# Altium PCB PCB1.PcbDoc
Units mm, origin at the board's own origin, x right, y up, seen from the top; angles counter-clockwise.
Board outline 149.22 x 99.06 mm, 2 copper layers (Top Layer, Bottom Layer); 29 components, 23 nets, 115 pads, 8 vias.
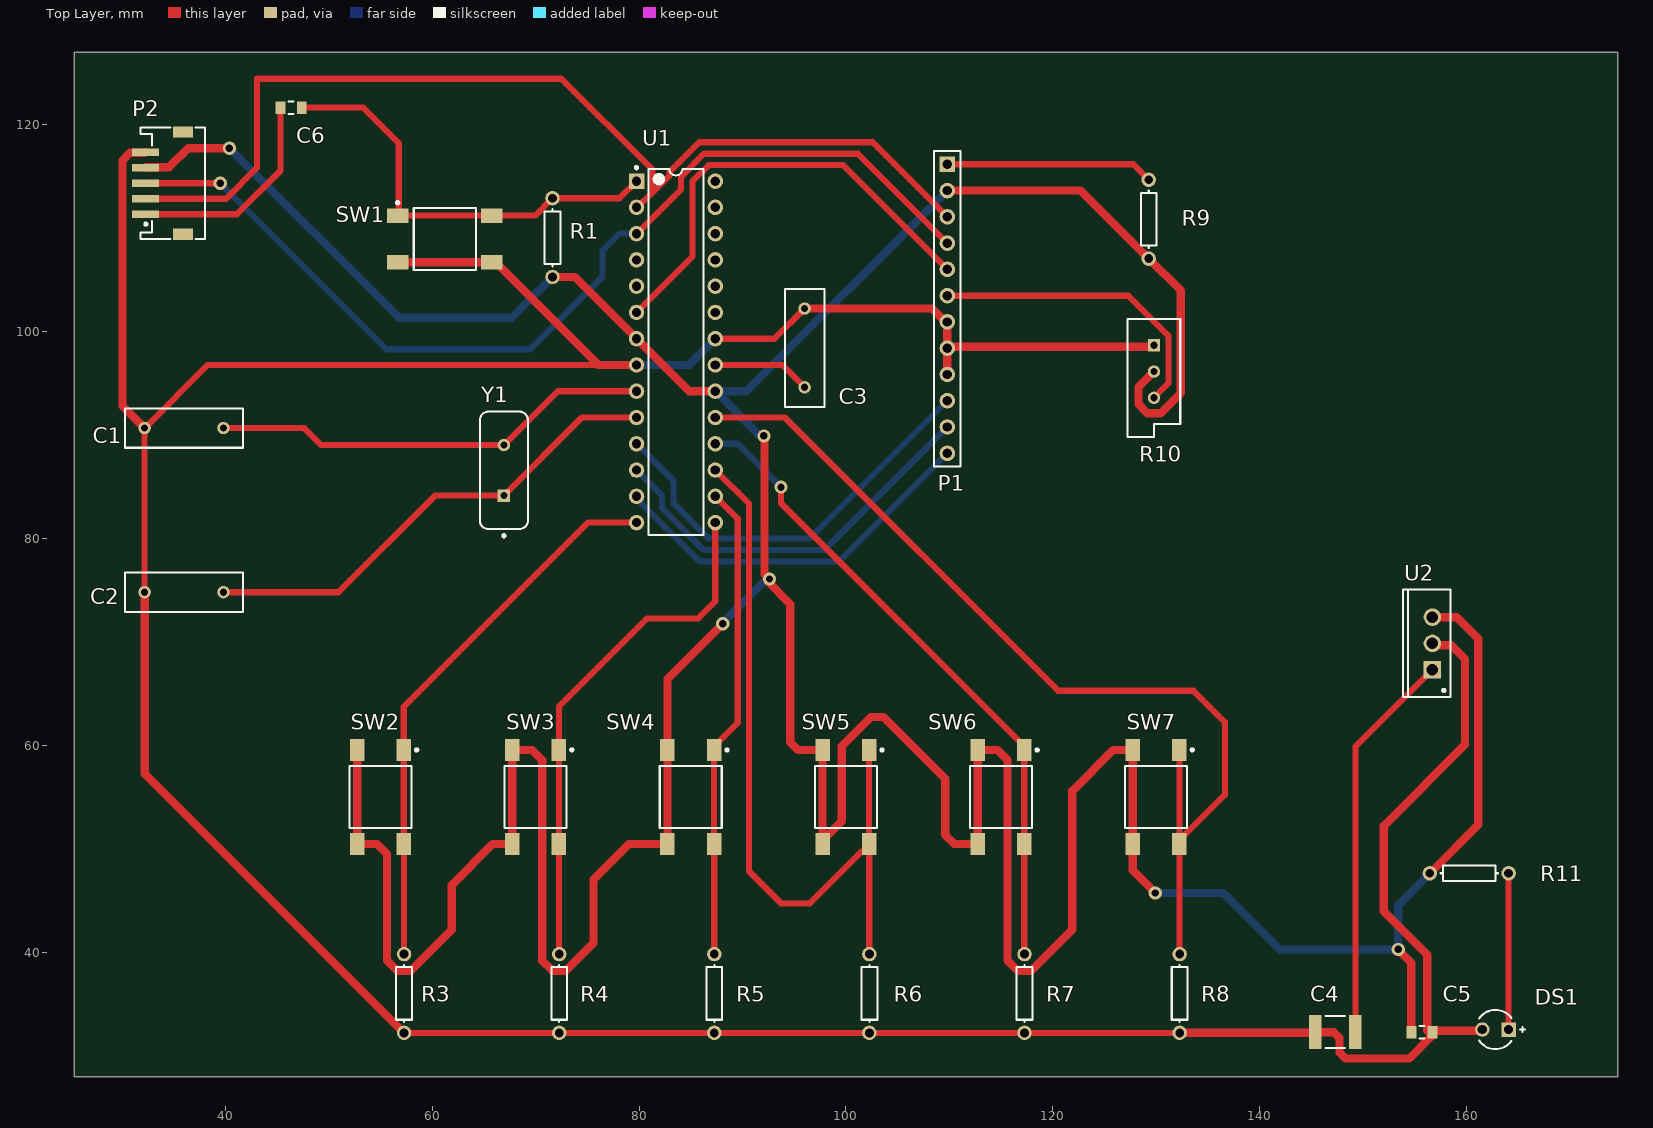
[diagram p0: Top Layer view]
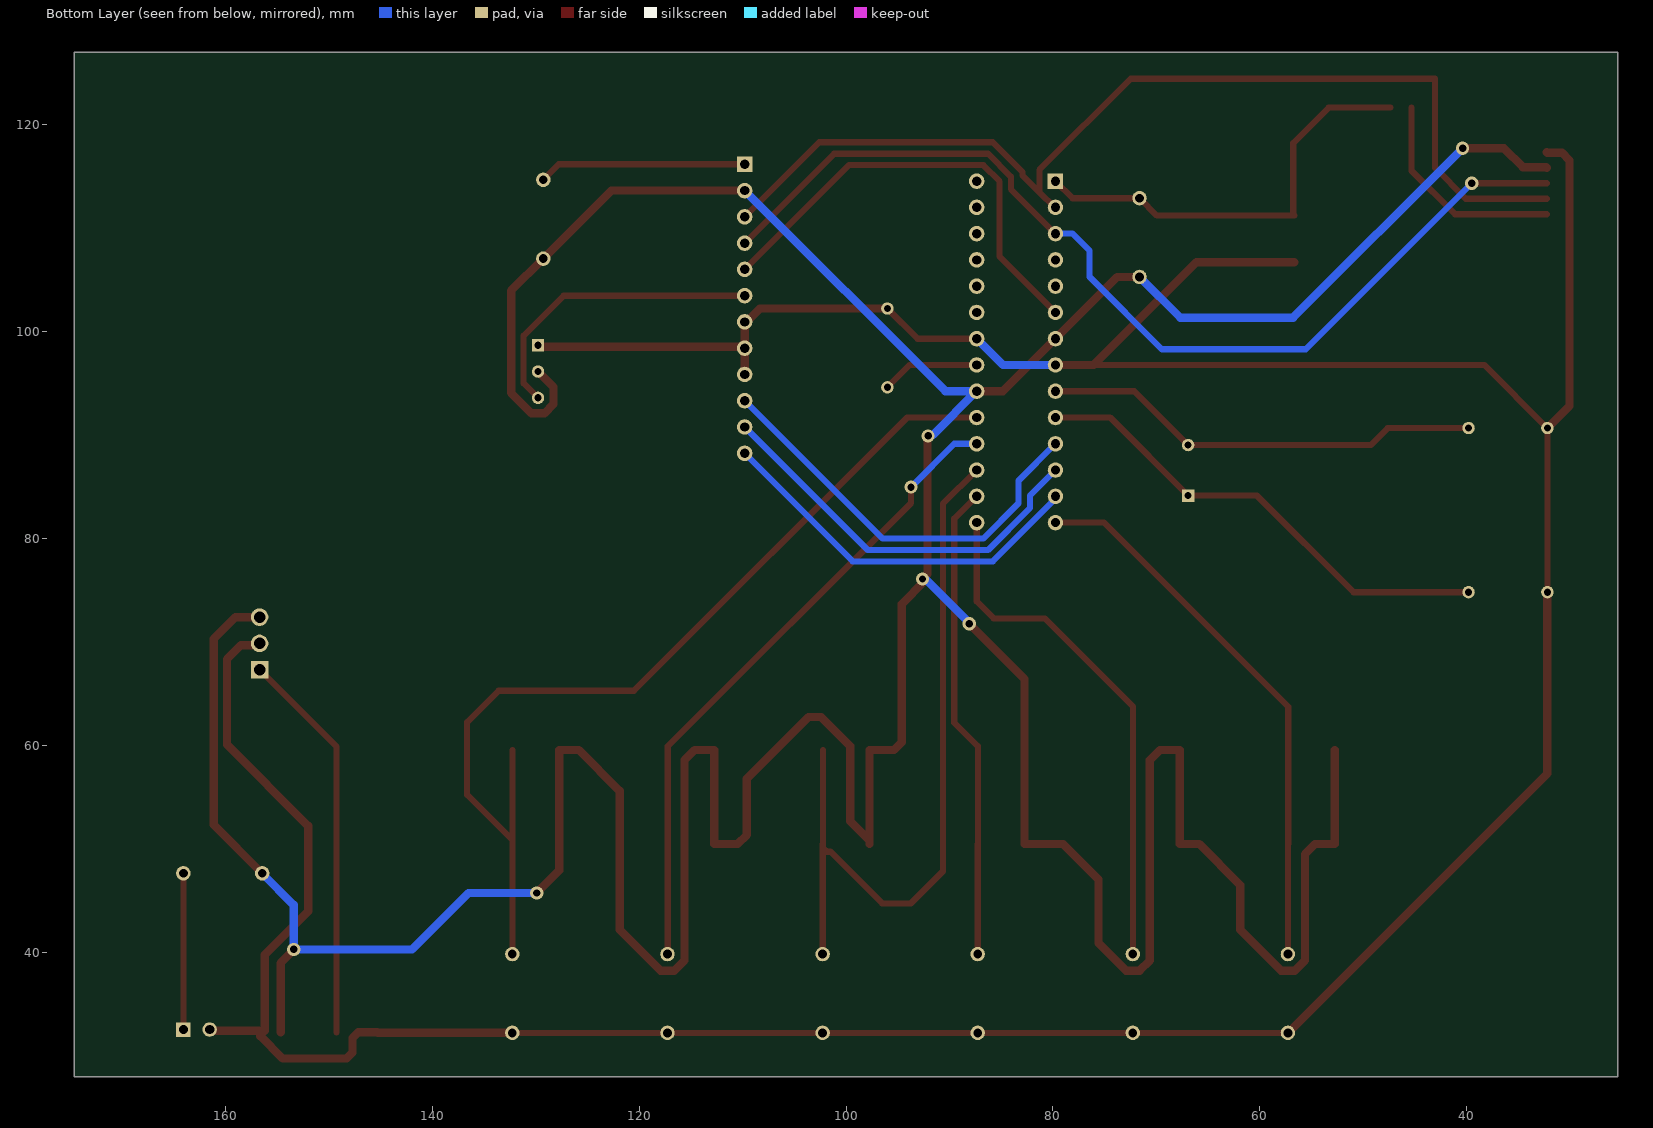
[diagram p1: Bottom Layer view, seen from below]

## Layer stack, top to bottom
Top Solder: solder mask 0.0102, Solder Resist, Dk 3.5
Top Layer: signal copper 0.0356
Dielectric 1: dielectric 0.32, FR-4, Dk 4.8
Bottom Layer: signal copper 0.0356
Bottom Solder: solder mask 0.0102, Solder Resist, Dk 3.5

## Board outline
25.4,127 174.625,127 174.625,27.94 25.4,27.94

## Design rules (kind name [scope] priority, off if disabled: settings)
Clearance [All] p1: gap=0.5 ignorepadtopadclearanceinfootprint=TRUE
PolygonConnect [All] p1: connectstyle=Relief reliefconductorwidth=0.254 reliefentries=4 polygonreliefangle="90 Angle" airgapwidth=0.254
RoutingVias [All] p1: holewidth=0.711 width=1.27 viastyle="Through Hole" minholewidth=0.711 minwidth=1.27 maxholewidth=0.711 maxwidth=1.27
SilkToSolderMaskClearance [IsPad] p1: minsilkscreentomaskgap=0.127 clearancetoexposedcopper=TRUE
SolderMaskExpansion [All] p1: expansion=0.102 istentingtop=FALSE
Width Width_1 [InNet('+5') or InNet('GND')] p1: maxlimit=0.9 minlimit=0.5 preferedwidth=0.8 minimp=50.000000 maximp=50.000000 favimp=50.000000
Width [All] p2: maxlimit=0.8 minlimit=0.3 preferedwidth=0.6 minimp=50.000000 maximp=50.000000 favimp=50.000000
29 further rules are at their usual default settings.

## Components (designator, comment, footprint, x,y, rotation, side; value= is the part's Value field where it differs from the comment)
C1 "22pF" RAD-0.3 36,90.678 r180 top
C2 "22pF" RAD-0.3 36,74.803 r180 top
C3 "100nF" RAD-0.3 96.012,98.425 r270 top
C4 "330nF" CAPC1812(4532)100_L 147.32,32.258 r0 top
C5 "100nF" FP-CGA3E-0_3-0_1-IPC_A 155.702,32.258 r0 top
C6 "100nF" FP-CGA3E-0_3-0_1-IPC_A 46.355,121.666 r180 top
DS1 "LED" INDPR60-254-520X380X650 162.814,32.512 r180 top
P1 "Header 12" HDR1X12 109.812,116.178 r270 top
P2 "To FTDI" 648105131822 34.908,114.348 r90 top
R1 "10K" AXIAL-0.3 71.628,109.093 r270 top
R3 "10K" AXIAL-0.3 57.277,36 r90 top
R4 "10K" AXIAL-0.3 72.277,36 r90 top
R5 "10K" AXIAL-0.3 87.277,36 r90 top
R6 "10K" AXIAL-0.3 102.277,36 r90 top
R7 "10K" AXIAL-0.3 117.277,36 r90 top
R8 "10K" AXIAL-0.3 132.277,36 r90 top
R9 "220 Ohm" AXIAL-0.3 129.286,110.871 r270 top
R10 "RPot" VR5 129.794,96.139 r270 top value=1K
R11 "1K" AXIAL-0.3 160.274,47.625 r0 top
SW1 "" TECO-FSM4JSMA_V 61.214,108.966 r90 top
SW2 "Select Button" TECO-FSM4JSMA_V 55,55 r0 top
SW3 "Up Button" TECO-FSM4JSMA_V 70,55 r0 top
SW4 "Down Button" TECO-FSM4JSMA_V 85,55 r0 top
SW5 "Left Button" TECO-FSM4JSMA_V 100,55 r0 top
SW6 "Right Button" TECO-FSM4JSMA_V 115,55 r0 top
SW7 "Back Button" TECO-FSM4JSMA_V 130,55 r0 top
U1 "ATmega328-PU" 28P3 83.566,98.044 r0 top
U2 "L78M05CV" TO220 156.718,69.85 r90 top
Y1 "16Mhz" FOX-FOXSLF160-20 66.929,86.587 r90 top

## Footprints (in the part's own frame and the unit in brackets; to place one, negate y for a bottom-side part, rotate by r counter-clockwise, add the part's x,y. Pads: shape width x height; smd on the part's side, far side on the other; paste and mask are expansions set on the pad)
28P3 [mm] "28-Pin Plastic Dual In-Line Package (PDIP)"
  rect 1.5x1.5 hole 0.9: 1(-3.81,16.51)
  round 1.5 hole 0.9: 2(-3.81,13.97) 3(-3.81,11.43) 4(-3.81,8.89) 5(-3.81,6.35) 6(-3.81,3.81) 7(-3.81,1.27) 8(-3.81,-1.27) 9(-3.81,-3.81) 10(-3.81,-6.35) 11(-3.81,-8.89) 12(-3.81,-11.43) 13(-3.81,-13.97) 14(-3.81,-16.51) 15(3.81,-16.51) 16(3.81,-13.97) 17(3.81,-11.43) 18(3.81,-8.89) 19(3.81,-6.35) 20(3.81,-3.81) 21(3.81,-1.27) 22(3.81,1.27) 23(3.81,3.81) 24(3.81,6.35) 25(3.81,8.89) 26(3.81,11.43) 27(3.81,13.97) 28(3.81,16.51)
  silkscreen extent -3.93,-17.7 2.65,17.93, body extent -3.6,-17.65 3.6,17.65, height 4.58
648105131822 [mm] "1.50mm SMT Male Horizontal Shrouded Header, 5p"
  rect 0.7x2.6 smd: 1(-3,2.65) 2(-1.5,2.65) 3(0,2.65) 4(1.5,2.65) 5(3,2.65)
  rect 1.1x1.9 smd: MP1(-4.95,-1) MP2(4.95,-1)
  silkscreen extent -5.4,-3.13 5.4,3.13, body extent -5.35,-3 5.35,3.47, height 3.74
AXIAL-0.3 [mm] "Axial Device, Thru-Hole; 2 Leads; 0.3 in Pin Spacing"
  round 1.4 hole 0.85: 1(-3.81,0) 2(3.81,0)
  silkscreen extent -2.77,-0.76 2.77,0.76
CAPC1812(4532)100_L [mm] "Chip Capacitor, Body 4.5x3.2mm, Height 1mm, IPC High Density"
  rect 1.2x3.3 smd: 1(-1.95,0) 2(1.95,0)
  silkscreen extent -0.95,-1.55 0.95,1.55, body extent -2.4,-1.7 2.4,1.7, height 1
FOX-FOXSLF160-20 [mm] "THD, 2-Leads, Body 11.35x4.65mm"
  rect 1.2x1.2 hole 0.7: 1(-2.44,0)
  round 1.2 hole 0.7: 2(2.44,0)
  silkscreen extent -6.45,-2.32 5.68,2.32, body extent -5.67,-2.32 5.68,2.33, height 3.6
FP-CGA3E-0_3-0_1-IPC_A [mm]
  rect 0.956x1.206 smd paste+0 mask+0: 1(-1.025,0) 2(1.025,0)
  silkscreen extent -0.25,-0.6 0.25,0.6, body extent -2,-1.1 2,1.1, height 0.25
HDR1X12 [mm] "Connector; Header; 12 Position"
  rect 1.5x1.5 hole 0.9: 1(0,0)
  round 1.5 hole 0.9: 2(2.54,0) 3(5.08,0) 4(7.62,0) 5(10.16,0) 6(12.7,0) 7(15.24,0) 8(17.78,0) 9(20.32,0) 10(22.86,0) 11(25.4,0) 12(27.94,0)
  silkscreen extent -1.27,-1.27 29.21,1.27
INDPR60-254-520X380X650 [mm] "THD, 2-Leads, Dia 3.8mm, Pitch 2.54mm"
  rect 1.4x1.4 hole 0.9: 1(-1.27,0)
  round 1.4 hole 0.9: 2(1.27,0)
  silkscreen extent -2.87,-1.9 1.58,1.9, body extent -1.9,-1.9 1.9,1.9, height 6.5
RAD-0.3 [mm] "Radial Cap, Thru-Hole; 2 Leads; 0.3 in Pin Spacing"
  round 1.2 hole 0.7: 1(-3.81,0) 2(3.81,0)
  silkscreen extent -5.71,-1.91 5.71,1.91
TECO-FSM4JSMA_V [mm] "SMD, 4-Leads, Body 6x6mm, Pitch 4.5mm"
  rect 1.4x2.1 smd: 1(2.25,4.55) 2(2.25,-4.55) 3(-2.25,4.55) 4(-2.25,-4.55)
  silkscreen extent -3,-3 3.62,4.67, body extent -3,-5 3,5, height 5.08
TO220 [mm] "TO, Thru-Hole, Vertical, Heatsink Mounted; 3 In-Line Leads; Pitch 2.54 mm"
  rect 1.7x1.7 hole 1.1: 1(-2.54,0)
  round 1.7 hole 1.1: 2(0,0) 3(2.54,0)
  silkscreen extent -5.2,-1.75 5.2,2.85, body extent -5.25,-1.8 5.25,2.9, height 19.7
VR5 [mm] "Thru-Hole; 3 Leads"
  rect 1.2x1.2 hole 0.7: 1(-2.54,0)
  round 1.2 hole 0.7: 2(0,0) 3(2.54,0)
  silkscreen extent -5.08,-2.54 6.35,2.54

## Part data
C1 C2 C3: library part Cap, "Capacitor", LatestRevisionDate=17-Jul-2002, LatestRevisionNote="Re-released for DXP Platform.", PackageDescription="Radial Cap, Thru-Hole; 2 Leads; 0.3 in Pin Spacing", PackageReference=RAD-0.3, Published=8-Jun-2000, Publisher="Altium Limited"
C4: library part CMP-1040-01492-1, "CAP 330nF 50V ±10% 1812 (4532 Metric) Thickness 1mm SMD", Case-EIA=1812, Case-Metric=4532, Rated Voltage="50 V", Tolerance=Â±10%, Max Thickness="1 mm", Technology=SMT
C5 C6: library part CMP-2000-07546-2, "Cap Ceramic 100nF 50V X7R 10% Pad SMD 0603 +125°C Automotive T/R", Case Code (Imperial)=0603, Case Code (Metric)=1608, Dielectric=X7R, Max Operating Temperature=125°C, Min Operating Temperature=-55°C, Package Quantity=1, Ratings=AEC-Q200, Tolerance=10%, Voltage=50V, Capacitance=100nF, Case/Package=0603, Composition=Ceramic, Depth=0.8mm, Height=0.8mm, Lead Free="Lead Free", Length=1.6mm, Mount="Surface Mount", Packaging="Tape and Reel", Radiation Hardening=No, REACH SVHC="No SVHC", Termination=SMD/SMT, Thickness=0.035inch, Voltage Rating=50V, Voltage Rating (DC)=50V, Weight=7.1E-05oz, Width=0.8mm
DS1: library part CMP-1674-00005-1, "Radial LED, 12.6 mcd, 20 mA, 2 V, -55 to 100 degC, 2-Pin THD, RoHS, Bulk", Case\Package=Radial, Current Rating="3.6 A", Max Operating Temperature="130 degC", Min Operating Temperature="-40 degC", Package Quantity=55, Resistance="0.045 Ohm", Tolerance=20%, ComponentLink1Description="Manufacturer URL", ComponentLink1URL=http://www.us.liteon.com/, ComponentLink2Description=Datasheet, ComponentLink2URL=https://datasheet.ciiva.com/15117/getdatasheetpartid-187746-15117985.pdf, DatasheetVersion=Dec-03, Height="1.1 inch", Lead Pitch="11.44 mm", Length="0.97 inch", Mount="Through Hole", PackageDescription="2-Pin Through Hole Device, Dia 3.8 mm, Pitch 2.54 mm", PackageReference=LTL-1CHE, Packaging=Tray, Radiation Hardening=No, RoHSCompliant=true, Shielding=Unshielded, Width="0.62 inch"
P1: "Header, 12-Pin", LatestRevisionDate=17-Jul-2002, LatestRevisionNote="Re-released for DXP Platform.", Publisher="Altium Limited"
P2: library part CMP-1502-00733-1, "Male Shrouded Header WR-WTB, SMT, Right Angled, pitch 1.5 mm, 1 x 5 position", Contact Resistance=20mOhm, Manufacturer="Wurth Elektronik", Operating Temperature=-25to85degC, Package Reference=648105131822, Working Voltage=50VAC, Datasheet URL=https://katalog.we-online.de/em/datasheet/6481xx131822.pdf, Gender=Male, Manufacturer URL=http://www.we-online.de, Mounting Technology=SMT, Orientation=RightAngled, Packaging=TapeandReel, Part Number=648105131822, Pitch=1.5mm, Position=1x5, Publisher=WurthElektronik
R1 R3 R4 R5 R6 R7 R8 R9 R11: library part Res1, "Resistor", LatestRevisionDate=17-Jul-2002, LatestRevisionNote="Re-released for DXP Platform.", PackageDescription="Axial Device, Thru-Hole; 2 Leads; 0.3 in Pin Spacing", PackageReference=AXIAL-0.3, Published=8-Jun-2000, Publisher="Altium Limited"
R10: "Potentiometer", LatestRevisionDate=17-Jul-2002, LatestRevisionNote="Re-released for DXP Platform.", PackageDescription="Variable Resistor, Thru-Hole; 3 Leads", PackageReference=VR5, Published=8-Jun-2000, Publisher="Altium Limited", Set Position=0.5, Sim Note="Enter the Resistance value and the set point into parameter fields."
SW1 SW2 SW3 SW4 SW5 SW6 SW7: library part CMP-2000-05602-2, "Swicth, SPST, 24 V, -35 to 85 degC, 4-Pin SMD, RoHS, Tape and Reel", Case\/Package=SMD/SMT, Contact Current Rating=50mA, Contact Resistance=100mOhm, Manufacturer="TE Connectivity", Max Operating Temperature=85degC, Max Voltage Rating (DC)=12V, Min Operating Temperature=-35degC, Operating Force=1.57N, Package Description="4-Pin Surface Mount Device, Body 6 x 6 mm, Pitch 4.5 mm", Package Quantity=750, Package Reference=FSM4JSMA, Voltage Rating=24V, Actuator Length=0.055inch, Actuator Material=Polyamide, Contact Material=CopperAlloy, Contact Plating=Silver, Current Rating=50mA, Datasheet URL=http://www.te.com/commerce/DocumentDelivery/DDEController?Action=showdoc&DocId=Customer+Drawing%7F2-1437565-7%7FV%7Fpdf%7FEnglish%7FENG_CD_2-1437565-7_V.pdf%7F4-1437565-2, Datasheet Version="Rev. V, 02/2015", Electrical Life=100000Cycles, Illumination Type=Illuminated, Length=6mm, Manufacturer URL=http://www.te.com/, Mechanical Life=100000Cycles, Mount=SurfaceMount, Mounting Technology=SurfaceMount, Orientation=Straight, Packaging=LoosePiece, REACH SVHC=Unknown, RoHSCompliant=true, Switch Travel=0.25mm, Termination=GullWing, Throw Configuration=SPST, Voltage Rating (DC)=24V, Width=6mm
U1: library part CMP-0095-00015-2, "8-bit AVR Microcontroller, 32KB Flash, 1KB EEPROM, 2KB SRAM, 28-pin PDIP, Industrial Grade (-40°C to 85°C)", ComponentLink1Description="Manufacturer URL", ComponentLink1URL=http://www.atmel.com/, ComponentLink2Description="ATmega48A/48PA/88A/88PA/168A/168PA/328/328P Datasheet", ComponentLink2URL=http://www.atmel.com/dyn/resources/prod_documents/8271.pdf, ComponentLink3Description="ATmega48A/48PA/88A/88PA/168A/168PA/328/328P Summary", ComponentLink3URL=http://www.atmel.com/dyn/resources/prod_documents/8271S.pdf, DatasheetVersion="revD, May-2011", PackageDescription="28-lead (0.300\"/7.62mm Wide) Plastic Dual Inline Package (PDIP)", PackageReference=28P3, PackageVersion="revB, Sep-2001", RevisionNote="DatasheetVersion updated. URLs added."
U2: library part CMP-0244-00437-1, "Positive Voltage Regulator, 5V, 3-Pin TO-220", ComponentLink1Description="Manufacturer URL", ComponentLink1URL=http://www.st.com, ComponentLink2Description=Datasheet, ComponentLink2URL=http://www.st.com/internet/com/TECHNICAL_RESOURCES/TECHNICAL_LITERATURE/DATASHEET/CD00000447.pdf, ComponentLink3Description="Package Specification", ComponentLink3URL=http://www.st.com/internet/com/TECHNICAL_RESOURCES/TECHNICAL_LITERATURE/PACKAGE_INFORMATION/CD00004649.pdf, DatasheetVersion=1/11/2010, PackageDescription="TO, Thru-Hole, Vertical, Heatsink Mounted; 3 In-Line Leads; Pitch 2.54 mm", PackageReference=TO220, PackageVersion=ver3.0
Y1: library part CMP-1749-00003-1, "Resistance Weld Thru-Hole Crystal, 16 MHz, -20 to 70 degC, 2-Pin THD, RoHS, Bulk", Case\Package=Axial, Max Operating Temperature="155 degC", Min Operating Temperature="-55 degC", Package Quantity=200, Power Rating="250 mW", Resistance="221 kohm", Tolerance=1%, Voltage Rating="250 V", ComponentLink1Description="Manufacturer URL", ComponentLink1URL=http://www.foxonline.com/, ComponentLink2Description=Datasheet, ComponentLink2URL=http://www.foxonline.com/pdfs/hc49slf.pdf, DatasheetVersion=Mar-15, Length="0.248 inch", Mount="Through Hole", PackageDescription="2-Pin Through Hole Device, Body 11.35 x 4.65 mm", PackageReference=FOXSLF160-20, Packaging=Bulk, RoHSCompliant=true

## Via types
v1: diameter 1.27, hole 0.711, Top Layer to Bottom Layer, 8 vias

## Nets (pads, with @x,y where several pads share a name; then routed paths per layer and width w, separated by ;. In a path a pad name is that pad's centre, name@x,y a point inside that pad or via, vN(x,y) a via of type N, cw(c..) or ccw(c..) an arc to the next point about the centre after c; other vN are vias at no path point)
+5: C5.1 P1.2 P2.4 R1.2 R9.2 R10.2 R11.1 SW2.3 SW2.4 SW3.3 SW3.4 SW4.3 SW4.4 SW5.3 SW5.4 SW6.3 SW6.4 SW7.3 SW7.4 U1.7 U1.20 U2.3 | length 501.2
  Top Layer w0.8: P2.4 32.308,115.898 34.56,115.898 36.391,117.729 v1(40.386,117.729) ; SW2.3 SW2.4 54.65,50.45 55.632,49.468 55.632,39.192 56.614,38.21 57.94,38.21 61.895,42.165 61.895,46.495 65.85,50.45 SW3.4 SW3.3 69.65,59.55 70.632,58.568 70.632,39.192 71.614,38.21 72.94,38.21 75.595,40.865 75.595,47.033 79.012,50.45 SW4.4 SW4.3 82.75,66.405 v1(88.1,71.755) ; R1.2 73.787,105.283 U1.7 84.836,94.234 U1.20 ; v1(92.075,89.916) 92.138,89.852 92.138,76.542 92.607,76.073 v1(92.621,76.073) ; v1@92.411,75.864 94.615,73.66 94.615,60.299 95.364,59.55 SW5.3 SW5.4@97.75,50.8 ; SW5.4 SW5.4@97.75,50.8 ; P1.2 122.709,113.638 R9.2 132.394,103.953 132.394,94.078 130.415,92.099 129.173,92.099 128.294,92.978 128.294,94.639 R10.2 ; v1(129.921,45.72) 127.75,47.891 SW7.4 SW7.3 125.85,59.55 121.895,55.595 121.895,42.165 117.94,38.21 116.614,38.21 115.632,39.192 115.632,58.568 114.65,59.55 SW6.3 SW6.4 110.49,50.45 109.601,51.339 109.601,56.769 103.632,62.738 102.415,62.738 99.614,59.936 99.614,52.664 SW5.4@97.75,50.8 ; v1(153.416,40.259) 153.416,40.186 154.677,38.925 C5.1 ; R11.1 161.163,52.324 161.163,70.27 159.043,72.39 U2.3
  Bottom Layer w0.8: v1(40.386,117.729) 56.769,101.346 67.691,101.346 R1.2 ; v1(88.1,71.755) 88.1,71.863 92.22,75.983 92.531,75.983 v1(92.621,76.073) ; v1(92.075,89.916) 91.985,90.006 91.604,90.006 U1.20 90.407,94.234 P1.2 ; v1(129.921,45.72) 136.525,45.72 141.986,40.259 v1(153.416,40.259) 153.416,44.577 R11.1
Back_But: R8.2 SW7.1 SW7.2 U1.19 | length 94.5
  Top Layer w0.6: U1.19 94.107,91.694 120.523,65.278 133.604,65.278 136.652,62.23 136.652,55.202 SW7.2@132.25,50.8 ; SW7.1 SW7.2@132.25,50.8 ; R8.2 132.263,39.823 132.263,50.436 SW7.2 SW7.2@132.25,50.8
D4: P1.5 U1.6 | length 44.4
  Top Layer w0.6: U1.6 85.159,107.257 85.159,114.529 86.734,116.104 99.726,116.104 P1.5
D5: P1.10 U1.11 | length 40.7
  Bottom Layer w0.6: U1.11 83.331,85.579 83.331,83.387 86.734,79.984 96.477,79.984 P1.10
D6: P1.11 U1.12 | length 38.9
  Bottom Layer w0.6: U1.12 82.231,84.139 82.231,82.931 86.278,78.884 97.917,78.884 P1.11
D7: P1.12 U1.13 | length 37.1
  Bottom Layer w0.6: U1.13 79.756,83.851 85.823,77.784 99.357,77.784 P1.12
Down_But: R5.2 SW4.1 SW4.2 U1.16 | length 46.1
  Top Layer w0.6: R5.2 87.264,39.823 87.264,50.436 SW4.2 SW4.1 87.25,59.9 89.535,62.185 89.535,81.915 U1.16
EN: P1.4 P2.3 U1.3 | length 97.8
  Top Layer w0.6: P2.3 v1(39.497,114.348) ; U1.3 84.059,113.777 84.059,114.985 86.278,117.204 101.166,117.204 P1.4
  Bottom Layer w0.6: v1(39.497,114.348) 55.547,98.298 69.469,98.298 76.454,105.283 76.454,107.823 78.105,109.474 U1.3
GND: C1.2 C2.2 C3.1 C4.1 C5.2 DS1.2 P1.7 P1.8 P1.9 P2.5 R3.1 R4.1 R5.1 R6.1 R7.1 R8.1 R10.1 SW1.3 SW1.4 U1.8 U1.22 U2.2 | length 382.1
  Top Layer w0.6: C2.2 C1.2 38.286,96.774 76.056,96.774 ; R3.1 R4.1 R5.1 R6.1 R7.1 R8.1 ; U1.22 93.091,99.314 C3.1
  Top Layer w0.8: C2.2 32.19,57.277 R3.1 ; C1.2 30.058,92.81 30.058,116.571 30.785,117.298 32.208,117.298 P2.5 ; SW1.3 SW1.4 66.114,106.716 76.056,96.774 U1.8 ; C3.1 108.351,102.235 109.647,100.938 P1.7 P1.8 ; P1.9 P1.8 ; R10.1 129.647,98.532 109.945,98.532 P1.8 ; R8.1 145.302,32.19 C4.1 147.17,32.258 147.734,31.694 147.734,30.272 148.297,29.708 154.481,29.708 156.649,31.876 156.649,32.18 C5.2 156.727,32.319 156.805,32.397 161.429,32.397 DS1.2 ; 156.228,32.385 156.228,39.733 152.019,43.942 152.019,52.212 159.863,60.056 159.863,68.326 158.511,69.678 156.89,69.678 U2.2
  Bottom Layer w0.8: U1.8 84.836,96.774 U1.22
Left_But: R4.2 SW3.1 SW3.2 U1.15 | length 50.9
  Top Layer w0.6: R4.2 72.264,39.823 72.264,50.436 SW3.2 SW3.1 72.25,63.741 80.772,72.263 85.725,72.263 87.376,73.914 U1.15
NetC1_1: C1.1 U1.9 Y1.2 | length 42.8
  Top Layer w0.6: C1.1 47.625,90.678 49.276,89.027 Y1.2 72.136,94.234 U1.9
NetC2_1: C2.1 U1.10 Y1.1 | length 46.9
  Top Layer w0.6: C2.1 50.927,74.803 60.271,84.147 Y1.1 74.476,91.694 U1.10
NetC3_2: C3.2 U1.21 | length 9.5
  Top Layer w0.6: U1.21 93.853,96.774 C3.2
NetC6_2: C6.2 P2.1 | length 20.9
  Top Layer w0.6: P2.1 41.117,111.348 45.33,115.561 C6.2
NetDS1_1: DS1.1 R11.2 | length 15.1
  Top Layer w0.6: DS1.1 R11.2
NetP1_1: P1.1 R9.1 | length 20.1
  Top Layer w0.6: P1.1 127.789,116.178 R9.1
NetP1_6: P1.6 R10.3 | length 29.6
  Top Layer w0.6: P1.6 127.326,103.478 131.194,99.61 131.194,94.999 R10.3
Reset: C6.1 R1.1 SW1.1 SW1.2 U1.1 | length 42.3
  Top Layer w0.6: C6.1 53.34,121.666 56.769,118.237 56.769,111.321 SW1.1 SW1.2 69.941,111.216 R1.1 78.105,112.903 U1.1
Right_But: R7.2 SW6.1 SW6.2 U1.18 | length 63
  Top Layer w0.6: v1(93.726,84.963) 93.726,83.424 117.25,59.9 SW6.1 SW6.2 117.25,39.875 ccw(c117.342,39.875) R7.2 R7.2@117.263,39.823
  Bottom Layer w0.6: U1.18 89.535,89.154 v1(93.726,84.963)
RS: P1.3 P2.2 U1.2 | length 100.6
  Top Layer w0.6: P2.2 40.077,112.848 43.053,115.824 43.053,124.46 72.481,124.46 81.306,115.635 81.306,113.473 ; U1.2 79.847,112.014 81.306,113.473 ; P1.3 102.606,118.304 85.823,118.304 82.959,115.44 82.959,115.126 81.306,113.473
Select_But: R3.2 SW2.1 SW2.2 U1.14 | length 53.8
  Top Layer w0.6: R3.2 57.263,39.823 57.263,50.436 SW2.2 SW2.1 57.25,63.727 75.057,81.534 U1.14
Up_But: R6.2 SW5.1 SW5.2 U1.17 | length 75.4
  Top Layer w0.6: U1.17 90.635,83.355 90.635,47.795 93.726,44.704 96.504,44.704 101.5,49.7 101.85,49.7 102.25,50.1 SW5.2 ; SW5.1 SW5.2 ; R6.2 102.263,39.823 102.263,50.437 SW5.2
VCC: C4.2 U2.1 | length 38.1
  Top Layer w0.6: C4.2 149.27,59.862 U2.1
pads on no net: P2.MP1 P2.MP2 U1.4 U1.5 U1.23 U1.24 U1.25 U1.26 U1.27 U1.28

## Silkscreen, mask and mechanical layers (free items; w line width, h text height)
Outline:
  lines w0.125: 174.625,126.365 174.625,27.94 25.4,27.94 25.4,127 173.99,127 174.625,127